# Altium PCB PCB.PcbDoc
Units mm, origin at the board's own origin, x right, y up, seen from the top; angles counter-clockwise.
Board outline 100 x 100 mm, 2 copper layers (Top Layer, Bottom Layer); 39 components, 20 nets, 100 pads, 0 vias.
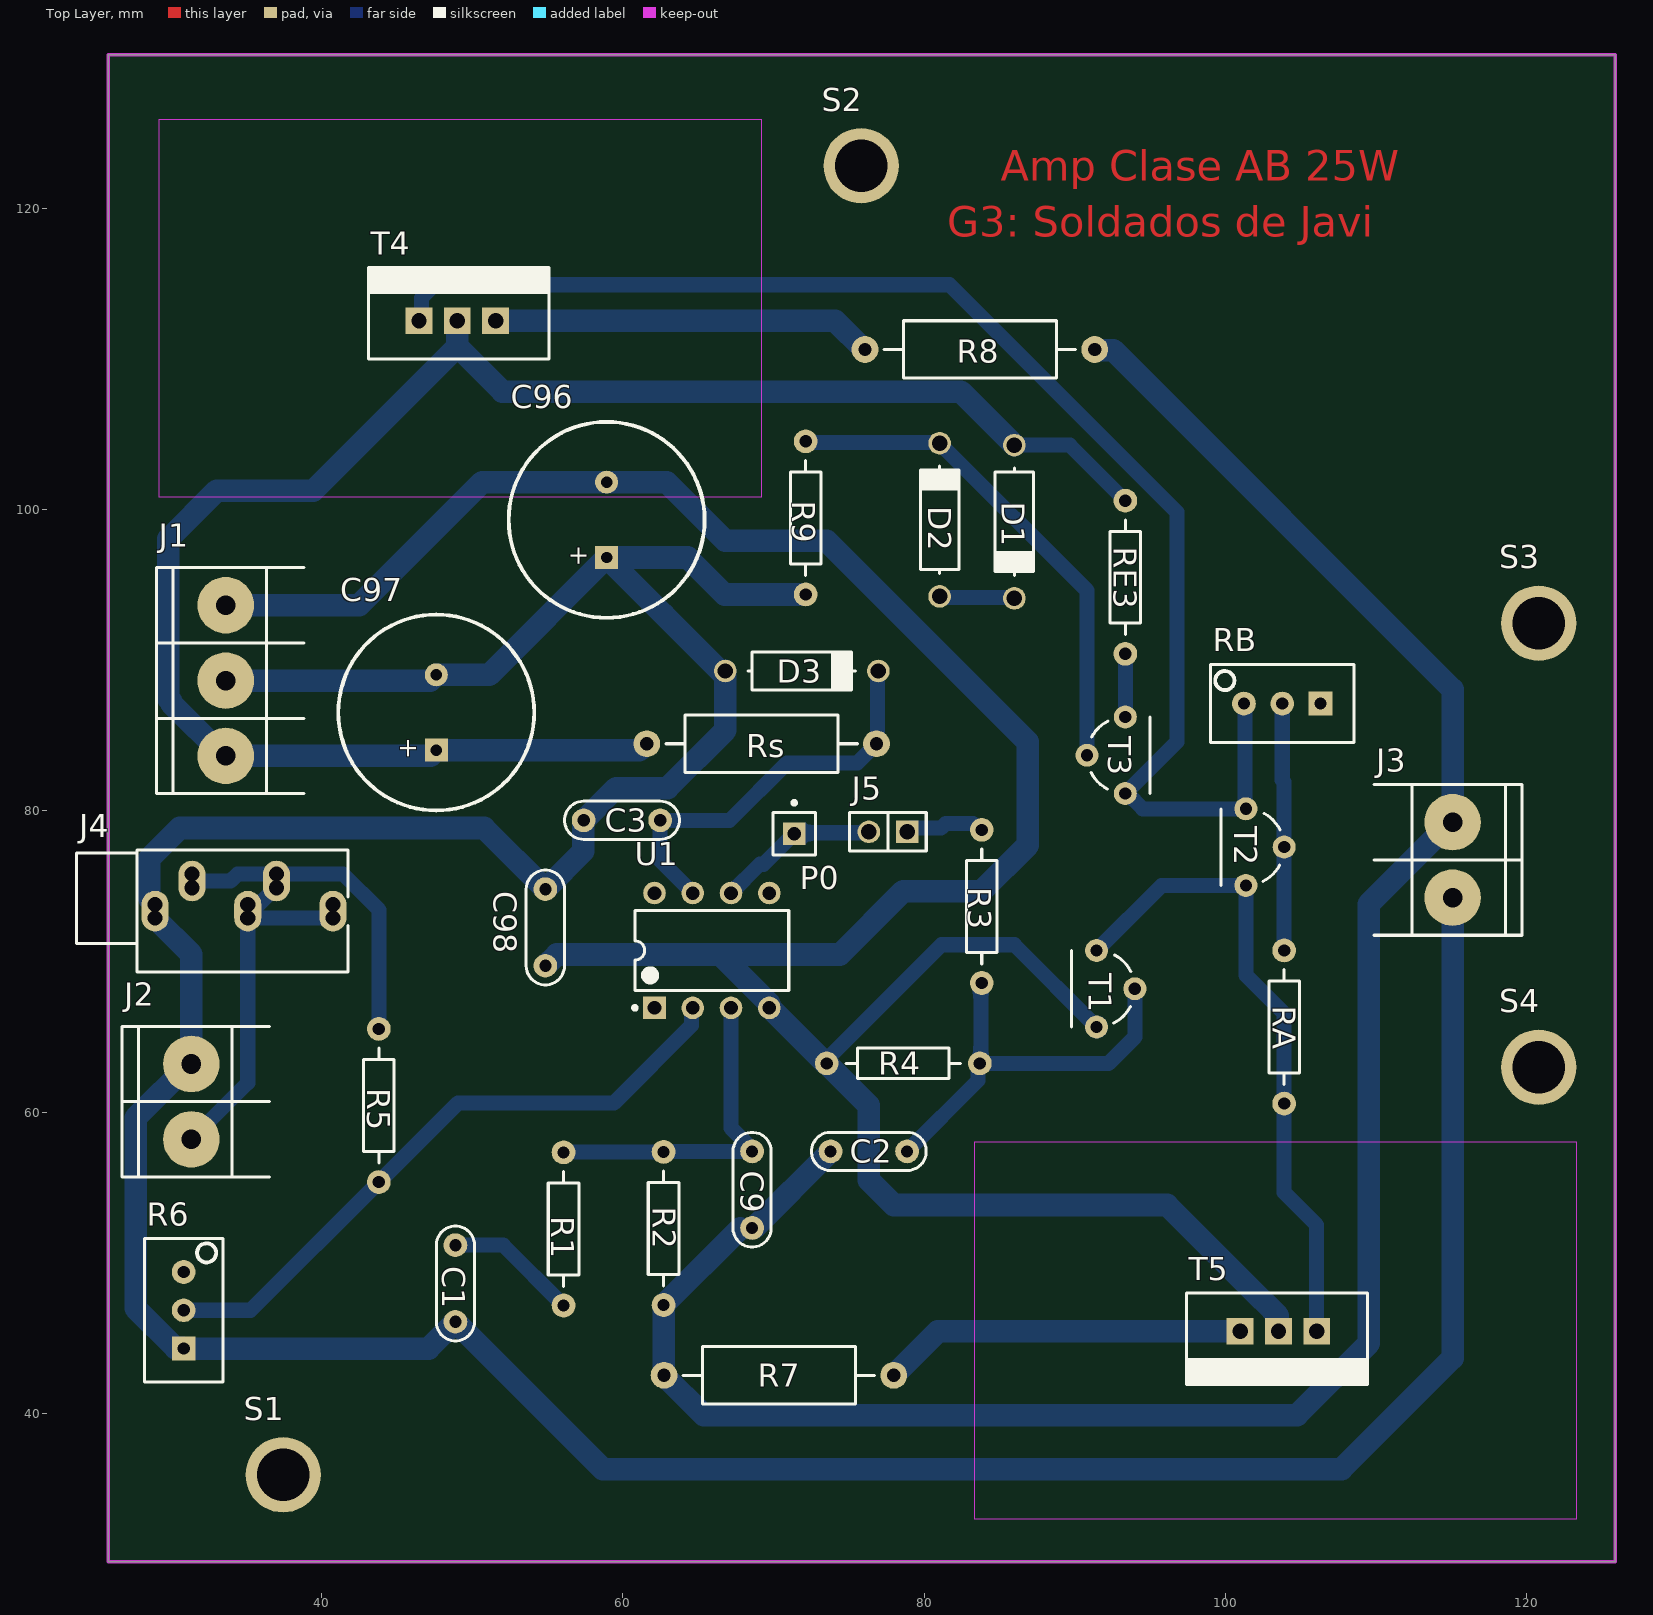
[diagram p0: Top Layer view]
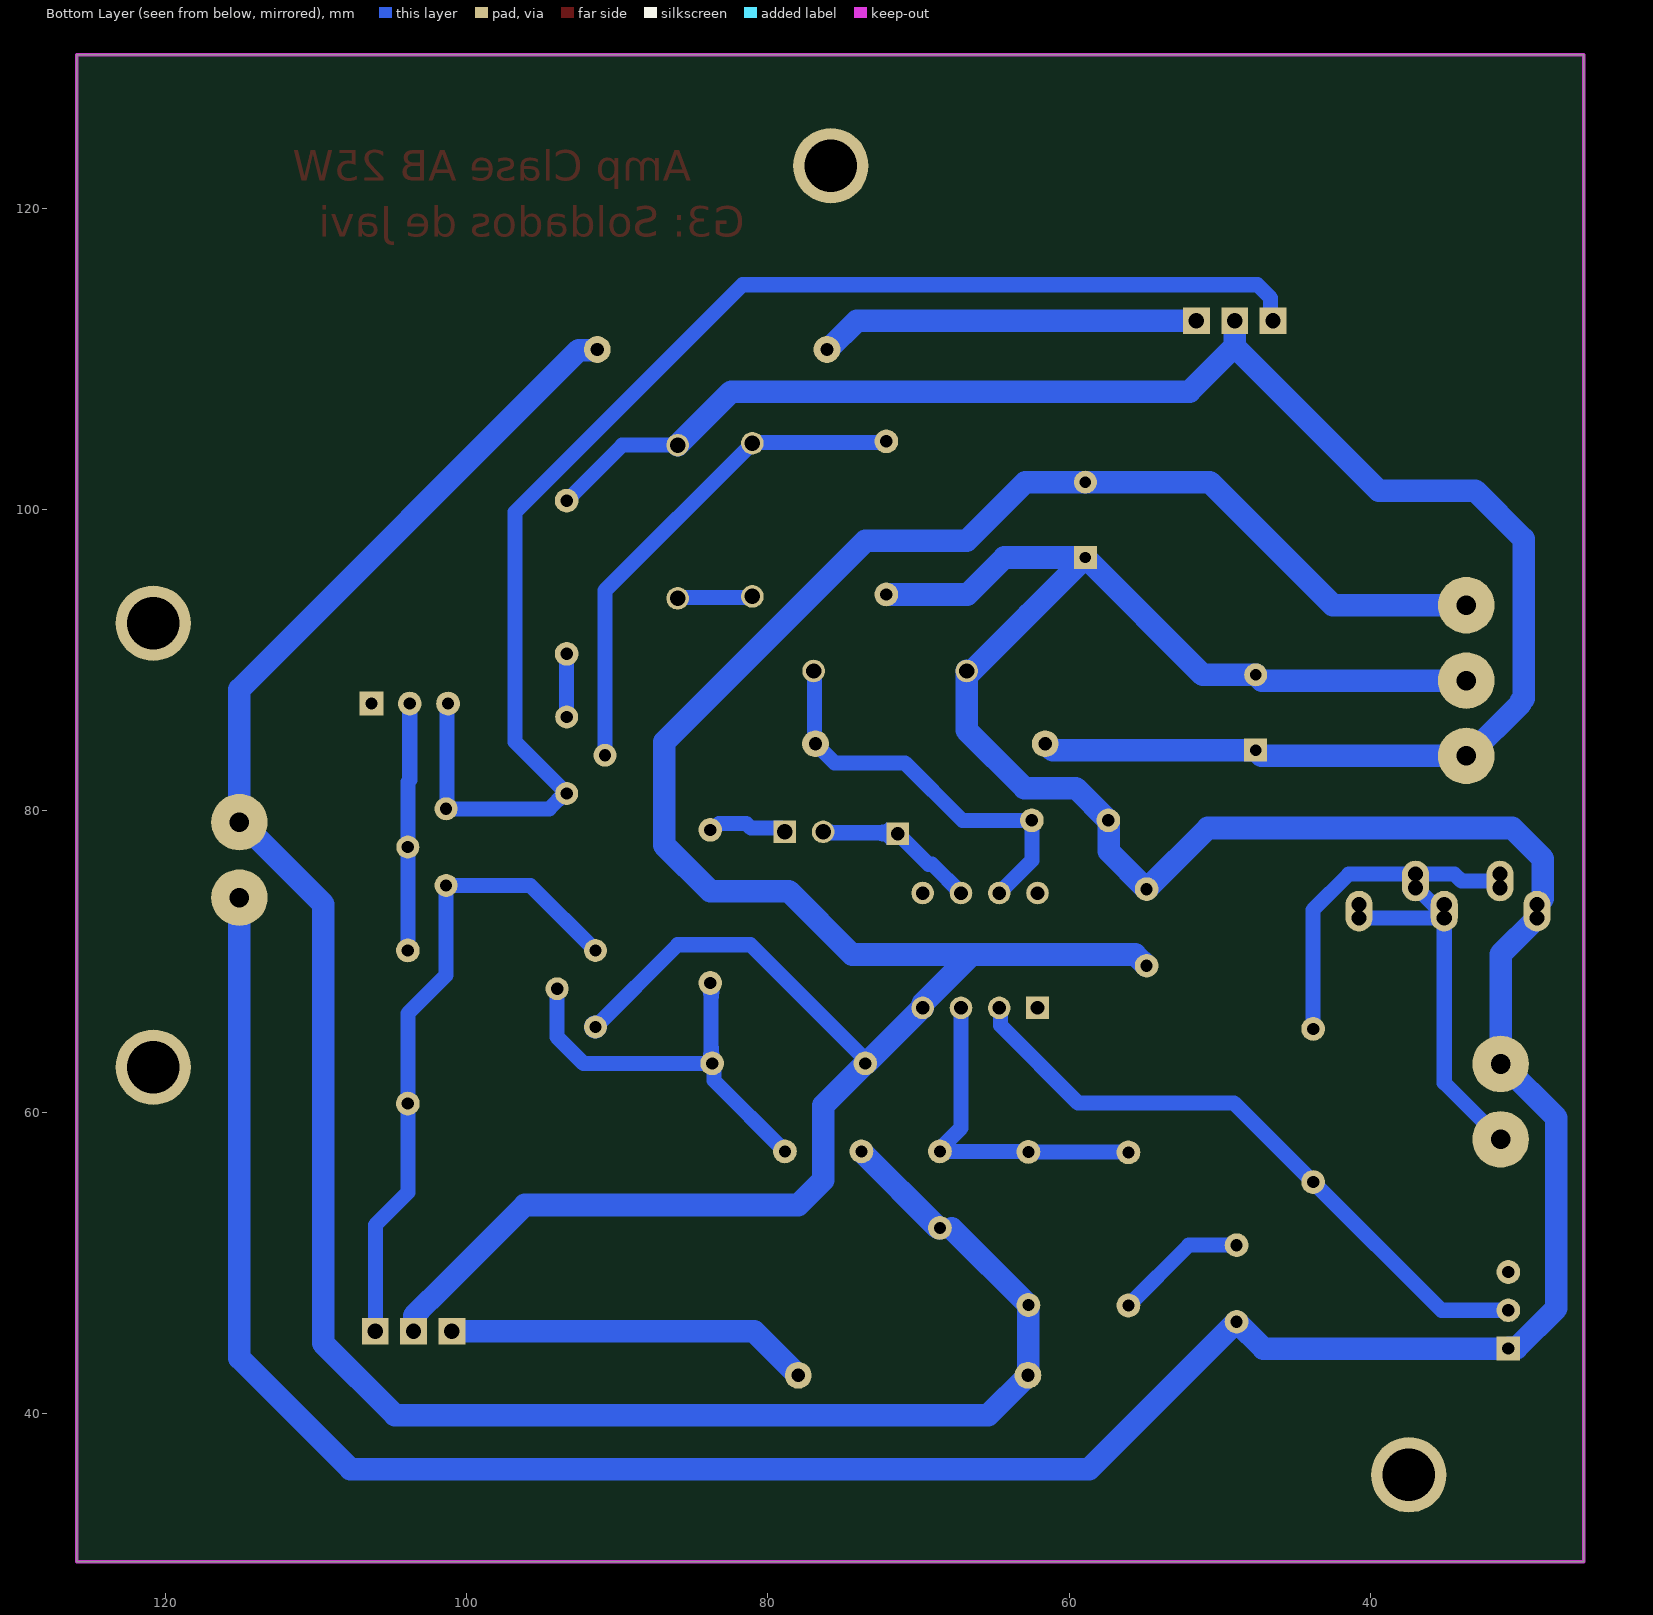
[diagram p1: Bottom Layer view, seen from below]
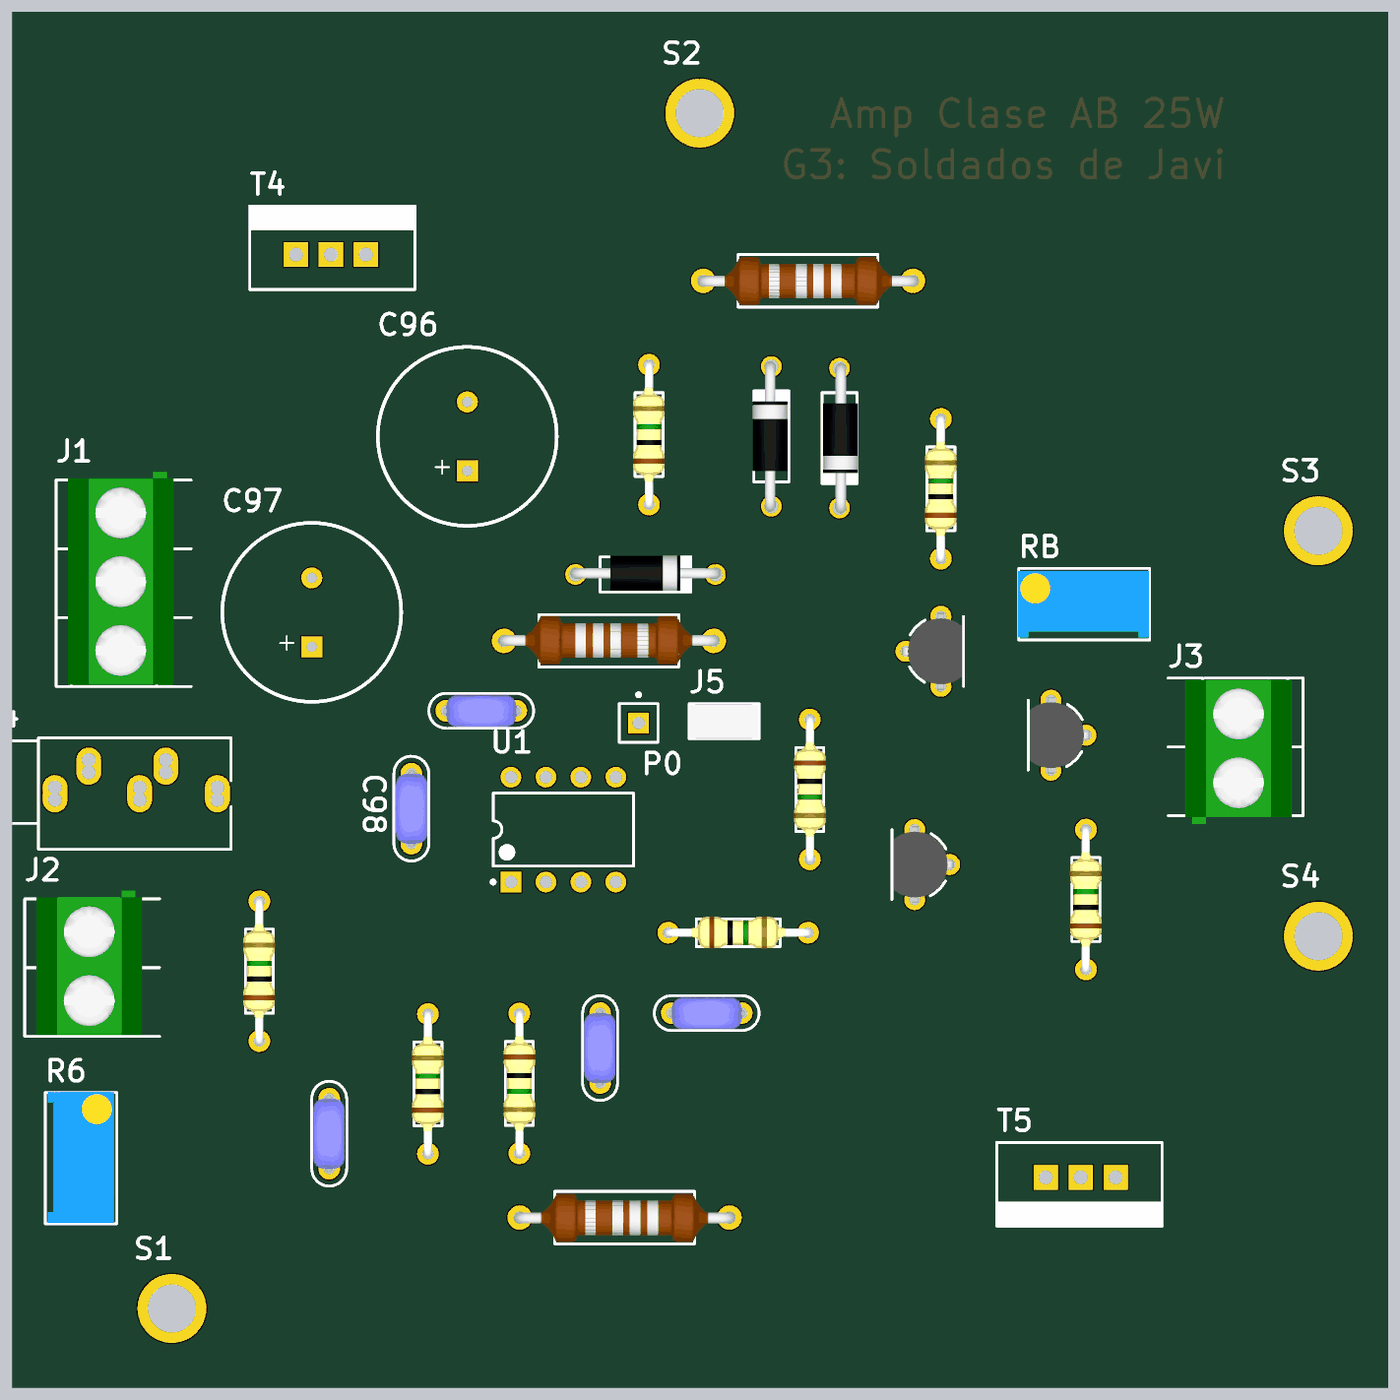
[diagram p2: 3D render of the assembled board from above, using the file's embedded part models]

## Layer stack, top to bottom
Top Solder: solder mask 0.0102, Solder Resist, Dk 3.5
Top Layer: signal copper 0.0356
Dielectric 1: dielectric 0.32, FR-4, Dk 4.8
Bottom Layer: signal copper 0.0356
Bottom Solder: solder mask 0.0102, Solder Resist, Dk 3.5

## Board outline
25.857,30.175 25.857,130.175 125.857,130.175 125.857,30.175

## Design rules (kind name [scope] priority, off if disabled: settings)
Clearance [All] p1: gap=0.5 ignorepadtopadclearanceinfootprint=FALSE
PlaneClearance [All] p1: clearance=0.75
PolygonConnect [All] p1: connectstyle=Relief reliefconductorwidth=0.5 reliefentries=4 polygonreliefangle="90 Angle" airgapwidth=0.254
RoutingVias [All] p1: holewidth=0.7 width=2 viastyle="Through Hole" minholewidth=0.7 minwidth=2 maxholewidth=0.7 maxwidth=2
SolderMaskExpansion [All] p1: expansion=0.102 istentingtop=FALSE
Width [All] p1: maxlimit=2 minlimit=1 preferedwidth=1
29 further rules are at their usual default settings.

## Components (designator, comment, footprint, x,y, rotation, side; value= is the part's Value field where it differs from the comment)
C1 "680u" CAP200 48.895,48.641 r270 top
C2 "100n" CAP200 76.327,57.404 r0 top
C3 "100n" CAP200 59.944,79.375 r0 top
C9 "220p" CAP200 68.58,54.864 r270 top
C96 "1m" CAP200RP2 58.928,99.314 r90 top
C97 "1m" CAP200RP2 47.625,86.527 r90 top
C98 "100n" CAP200 54.864,72.263 r90 top
D1 "DIODO" DO41 85.979,99.187 r270 top
D2 "DIODO" DO41 81.026,99.314 r90 top
D3 "3.3V" DO41 71.882,89.281 r0 top
J1 "BORNERA 3" BORNERA3 33.655,88.646 r0 top
J2 "BORNERA 2" BORNERA2 31.369,60.706 r0 top
J3 "BORNERA 2" BORNERA2 115.062,76.748 r180 top
J4 "Phonejack Stereo SW" ST-3150-5N 23.767,74.198 r90 top
J5 "JUMPER" JUMPER2 77.597,78.613 r180 top
P0 "Plug" PIN1 71.374,78.486 r0 top
R1 "22" RES400 56.07,47.18 r90 top
R2 "10k" RES400 62.706,57.372 r270 top
R3 "1k5" RES400 83.82,78.74 r270 top
R4 "220" RES400 73.533,63.246 r0 top
R5 "100k" RES400 43.815,55.372 r90 top
R6 "10K" "PRESET V" 30.861,46.863 r90 top
R7 "0.33" RES600 77.978,42.545 r180 top
R8 "0.33" RES600 91.313,110.617 r180 top
R9 "22k" RES400 72.136,94.361 r90 top
RA "1000" RES400 103.886,60.579 r90 top
RB "10K" "PRESET V" 103.759,87.122 r180 top
RE3 "330" RES400 93.345,90.424 r90 top
Rs "1k" RES600 61.595,84.455 r0 top
S1 "" "SUJECION (5.00MM - 3.50MM)" 37.465,35.941 r90 top
S2 "" "SUJECION (5.00MM - 3.50MM)" 75.819,122.809 r90 top
S3 "" "SUJECION (5.00MM - 3.50MM)" 120.777,92.456 r90 top
S4 "" "SUJECION (5.00MM - 3.50MM)" 120.777,62.992 r90 top
T1 "BC547" TO92 92.71,68.199 r90 top
T2 "BC547" TO92 102.616,77.597 r90 top
T3 "BC557" TO92 92.075,83.693 r270 top
T4 "TIP122" "TO-220 V" 49.022,112.522 r0 top
T5 "TIP127" "TO-220 V" 103.505,45.466 r180 top
U1 "TL081CP" P0008A 65.913,70.739 r90 top

## Footprints (in the part's own frame and the unit in brackets; to place one, negate y for a bottom-side part, rotate by r counter-clockwise, add the part's x,y. Pads: shape width x height; smd on the part's side, far side on the other; paste and mask are expansions set on the pad)
BORNERA2 [mm] "Bornera con Tornillos 5mm separación"
  round 3.75 hole 1.3: 1(0,2.5) 2(0,-2.5)
  silkscreen extent -4.6,-5 5.2,5, body extent -3.76,-4.89 3.94,5.61, height 10
BORNERA3 [mm] "Bornera con Tornillos 5mm separación"
  round 3.75 hole 1.3: 1(0,5) 2(0,0) 3(0,-5)
  silkscreen extent -4.6,-7.5 5.2,7.5, body extent -3.76,-7.39 3.94,8.11, height 10.05
CAP200 [mil]
  round 62 hole 32: 1(-100,0) 2(100,0)
  silkscreen extent -150,-50 150,50, body extent -110,-46 110,44, height 246
CAP200RP2 [mil] "Body Diameter 12.5mm"
  rect 60x60 hole 30: 1(-98.43,0)
  round 60 hole 30: 2(98.43,0)
  silkscreen extent -256,-256 256,256, body extent -246,-245 244,246, height 787
DO41 [mm]
  round 1.5 hole 1.016: 1(-5.08,0) 2(5.08,0)
  silkscreen extent -3.56,-1.27 3.56,1.27, body extent -5.46,-1.19 5.46,1.37, height 2.03
JUMPER2 [mm]
  rect 1.5x1.5 hole 1.016: 1(-1.27,0)
  round 1.5 hole 1.016: 2(1.27,0)
  silkscreen extent -2.54,-1.27 2.54,1.27, body extent -2.46,-1.27 2.54,1.27, height 9.5
P0008A [mm] "DIP, 8-Leads, Body 10.15x6.6mm, Pitch 2.54mm"
  rect 1.5x1.5 hole 0.9: 1(-3.81,3.81)
  round 1.5 hole 0.9: 2(-3.81,1.27) 3(-3.81,-1.27) 4(-3.81,-3.81) 5(3.81,-3.81) 6(3.81,-1.27) 7(3.81,1.27) 8(3.81,3.81)
  silkscreen extent -3.93,-5.1 2.65,5.23, body extent -3.95,-5.07 3.95,5.07, height 5.08
PIN1 [mm] "Connector; Plug"
  rect 1.5x1.5 hole 0.9: 1(0,0)
  silkscreen extent -1.4,-1.4 1.4,2.17
"PRESET V" [mil]
  rect 62x62 hole 32: 1(-100,0)
  round 62 hole 32: 2(0,0) 3(100,0)
  silkscreen extent -188,-102 188,102, body extent -185,-95 190,95, height 455
RES400 [mil]
  round 62 hole 32: 1(0,0) 2(400,0)
  silkscreen extent 50,-40 350,40, body extent -12,-45 412,46, height 96
RES600 [mil]
  round 70 hole 35: 1(0,0) 2(600,0)
  silkscreen extent 50,-75 550,75, body extent -16,-68 616,70, height 141
ST-3150-5N [mm] "Connector; Stereo Jack, 3.5mm, 5 Position"
  oval 2.7x1.8 all layers, no hole: 1(-0.85,-5.2) 2(1.15,-7.65) 3(-0.85,-11.35) 4(1.15,-13.25) 5(-0.85,-17)
  round 1.2 hole 1: 1A(-1.3,-5.2) 1B(-0.4,-5.2) 2A(0.7,-7.65) 2B(1.6,-7.65) 3A(-1.3,-11.35) 3B(-0.4,-11.35) 4A(0.7,-13.25) 4B(1.6,-13.25) 5A(-1.3,-17) 5B(-0.4,-17)
  silkscreen extent -4.9,-18 3.2,0
"SUJECION (5.00MM - 3.50MM)" [mm]
  round 5 hole 3.5: 1(0,0)
TO92 [mil]
  round 60 hole 32: 1(0,-50) 2(100,50) 3(-100,50)
  silkscreen extent -100,-39 100,115, body extent -110,-61 110,110, height 315
"TO-220 V" [mil]
  rect 70x70 hole 40: 1(-100,0) 2(0,0) 3(100,0)
  silkscreen extent -232,-100 240,139, body extent -197,-79 197,118, height 709

## Part data
C1 C2 C3 C9 C98: library part CAP
C96 C97: library part CAPPOL
D3: library part "DIODO ZENER"
J4: "3-Conductor Jack with 2 break contacts (normals) and 2 auxiliary make contacts", ComponentLink1Description="Manufacturer Link", ComponentLink1URL=http://domino.kycon.com/internet/Products.html, DatasheetDocument=07-Mar-2000, LatestRevisionDate=17-Dec-2003, LatestRevisionNote="PCB Footprint replaced.", Published=5-Jan-2004, Publisher="Altium Limited"
R1 R2 R3 R4 R5 R7 R8 R9 RA RE3 Rs: library part RES
R6 RB: library part PRESET
S1 S2 S3 S4: library part SUJECION
T1 T2 T4: library part "TRANSISTOR NPN"
T3 T5: library part "TRANSISTOR PNP"
U1: library part CMP-0017-00937-2, "JFET-Input Operational Amplifier, 7 to 36 V, 0 to 70 degC, 8-pin DIP (P8), Pb-Free (RoHS)", Manufacturer="Texas Instruments", Rating=Military, Total Supply Voltage(Max)(+5V is 5, +/-5V is 10)=36, Total Supply Voltage(Min)(+5V is 5, +/-5V is 10)=7, CMRR(Min)(dB)=70, Code_JEDEC=MS-001, ComponentLink1Description="Manufacturer URL", ComponentLink1URL=http://www.ti.com/, ComponentLink2Description=Datasheet, ComponentLink2URL=http://www.ti.com/lit/ds/symlink/tl081.pdf, ComponentLink3Description="Package Specification", ComponentLink3URL=http://www.ti.com/litv/pdf/mpdi001b, DatasheetVersion=SLOS081G, Eco-Plan="Pb-Free (RoHS)", GBW(Typ)(MHz)=3, IIB(Max)(pA)=400, Iq per channel(Max)(mA)=2.8, Mounting Technology="Through Hole", Number of Channels=1, Offset Drift(Typ)(uV/C)=18, PackageDescription="8-Pin Plastic In-Line, Body 9.59 x 6.35 mm, Pitch 2.54 mm", PackageReference=P0008A, PackageVersion="4040082/E, 04/2010", PartNumber=TL081CP, Slew Rate(Typ)(V/us)=13, Sub Family="General Purpose Amplifier, High Supply Voltage Amplifier (>=30V)", Vio (25C)(Max)(mV)=15, Vn at 1kHz(Typ)(nV/rtHz)=18
P0: LatestRevisionDate=17-Jul-2002, LatestRevisionNote="Re-released for DXP Platform.", Publisher="Altium Limited"

## Nets (pads, with @x,y where several pads share a name; then routed paths per layer and width w, separated by ;. In a path a pad name is that pad's centre, name@x,y a point inside that pad or via, vN(x,y) a via of type N, cw(c..) or ccw(c..) an arc to the next point about the centre after c; other vN are vias at no path point)
-VCC: C96.2 C98.1 J1.1 R4.1 T1.3 T5.2 U1.4 | length 180.8
  Bottom Layer w1: J1.1 J1.1@33.872,93.429 ; U1.4 U1.4@69.787,66.929 ; R4.1 73.533,63.402 73.82,63.689 73.82,63.787 81.15,71.117 85.982,71.117 T1.3@91.435,65.664
  Bottom Layer w1.5: J1.1 42.509,93.646 50.677,101.814 C96.2 62.908,101.814 66.805,97.917 73.533,97.917 86.868,84.582 86.868,77.724 83.82,74.676 78.613,74.676 74.406,70.469 66.471,70.469 ; C98.1 54.884,69.723 55.63,70.469 66.471,70.469 ; U1.4 69.723,67.217 66.471,70.469 ; U1.4@69.787,66.929 R4.1@73.469,63.246 ; R4.1 76.324,60.455 76.324,55.502 77.978,53.848 96.119,53.848 102.362,47.605 102.372,47.605 103.104,46.873 103.104,46.863 103.465,46.502 103.465,46.045 103.505,46.005 T5.2 ; T1.3@91.435,65.664 T1.3
GND: C1.2 C3.1 C96.1 C97.2 C98.2 D3.1 J1.2 J2.1 J3.1 J4.1 J4.1A J4.1B R6.1 R9.1 | length 263.6
  Bottom Layer w1.5: J4.1B 28.575,74.19 28.575,76.835 30.607,78.867 50.8,78.867 C98.2 57.39,77.329 57.39,79.361 C3.1 57.424,79.375 59.56,81.511 62.969,81.511 66.802,85.344 D3.1 66.461,89.281 62.701,93.042 C96.1 ; J4.1@29.024,73.798 29.024,73.405 J4.1 J4.1A 31.369,70.496 J2.1 31.242,63.206 27.686,59.65 27.686,46.99 30.316,44.36 30.824,44.36 R6.1 47.117,44.323 C1.2 58.674,36.322 107.696,36.322 115.062,43.688 J3.1 ; J1.2 47.238,88.646 47.619,89.027 C97.2 51.141,89.027 C96.1 ; R9.1 66.754,94.361 64.301,96.814 C96.1
NetC1_1: C1.1 R1.1 | length 8.9
  Bottom Layer w1: C1.1@48.927,51.213 C1.1 52.07,51.181 R1.1 R1.1@56.039,47.149
NetC2_2: C2.2 R3.2 R4.2 T1.1 | length 27.4
  Bottom Layer w1: C2.2 83.583,62.12 83.583,63.136 R4.2 ; R3.2 83.757,68.516 83.757,63.309 R4.2 ; T1.1 93.98,65 92.226,63.246 R4.2
NetC9_1: C9.1 R1.2 R2.1 U1.3 | length 22.6
  Bottom Layer w1: R1.2 56.086,57.356 62.69,57.356 R2.1 62.722,57.388 68.564,57.388 C9.1 68.58,57.56 67.183,58.957 U1.3
NetD1_2: D1.2 D2.1 | length 5.2
  Bottom Layer w1: D2.1@81.09,94.297 D2.1 81.09,94.17 85.915,94.17 D1.2 D1.2@85.915,94.043
NetD2_2: D2.2 R9.2 T3.1 | length 33.8
  Bottom Layer w1: R9.2@72.2,104.584 R9.2 72.2,104.457 80.962,104.457 D2.2 90.805,94.615 T3.1
NetJ5_1: J5.1 R3.1 | length 5.4
  Bottom Layer w1: J5.1 79.117,78.863 81.117,78.863 81.431,79.177 83.228,79.177 83.664,78.74 R3.1
NetJ5_2: J5.2 P0.1 U1.6 | length 10.8
  Bottom Layer w1: U1.6 69.092,76.458 69.346,76.458 71.438,78.549 76.263,78.549 J5.2
NetR5_1: R5.1 R6.2 U1.2 | length 42.7
  Bottom Layer w0.5: U1.2@64.643,66.908 U1.2
  Bottom Layer w1: R6.2 35.306,46.863 R5.1 49.06,60.617 59.412,60.617 64.547,65.752 64.547,66.833 U1.2
NetR7_1: R7.1 T5.3 | length 24.2
  Bottom Layer w1.5: R7.1 80.899,45.466 T5.3
NetR8_2: R8.2 T4.3 | length 25.3
  Bottom Layer w1.5: T4.3 74.093,112.522 75.998,110.617 R8.2
NetRA_1: RA.1 T1.2 T2.3 T5.1 | length 43.2
  Bottom Layer w1: T1.2 95.758,75.057 T2.3 101.346,69.095 103.886,66.555 RA.1 103.886,54.677 106.045,52.518 T5.1
NetRA_2: RA.2 RB.2 T2.1 | length 16.4
  Bottom Layer w1: RB.2 103.759,82.042 103.886,81.915 RA.2
NetRB_3: RB.3 T2.2 T3.2 T4.1 | length 93.9
  Bottom Layer w1: T4.1 46.633,112.673 46.633,114.032 47.512,114.911 81.685,114.911 96.774,99.822 96.774,84.582 T3.2 93.487,81.153 94.503,80.137 T2.2 101.282,80.2 101.282,87.058 RB.3
NetRE3_1: RE3.1 T3.3 | length 4.2
  Bottom Layer w1: T3.3 RE3.1
Out: C2.1 C9.2 J3.2 R2.2 R7.2 R8.1 | length 147.9
  Bottom Layer w1.5: C9.2@67.804,52.31 R2.2 62.721,47.198 62.721,42.562 R7.2 65.377,39.906 104.738,39.906 109.501,44.669 109.501,73.813 114.935,79.248 J3.2 115.062,88.058 92.556,110.564 91.366,110.564 R8.1 ; C9.2 68.594,52.338 68.721,52.338 C2.1
Signal: J2.2 J4.2 J4.2A J4.2B J4.3 J4.3A J4.3B J4.4 J4.4A J4.4B J4.5 J4.5A J4.5B R5.2 | length 47.2
  Bottom Layer w1: J2.2 35.117,61.954 J4.3A J4.5A ; J4.2@31.787,74.745 31.417,75.114 J4.2 33.98,75.348 34.43,75.798 J4.4B 41.454,75.798 43.815,73.437 R5.2 ; J4.3B 35.155,73.836 35.901,73.836 36.963,74.898 J4.4A ; J4.4 37.017,75.114 J4.4@37.387,74.745
VCC: C97.1 D1.1 J1.3 RE3.2 Rs.1 T4.2 | length 119.2
  Bottom Layer w1: Rs.1@61.531,84.391 Rs.1 ; D1.1 89.662,104.267 RE3.2
  Bottom Layer w1.5: T4.2 49.022,110.809 ; Rs.1 61.52,84.455 61.092,84.027 C97.1 47.244,83.646 J1.3 33.528,83.646 30.03,87.144 30.03,87.271 29.845,87.456 29.845,98.044 33.056,101.255 39.468,101.255 49.022,110.809 ; D1.1 82.424,107.822 52.009,107.822 49.022,110.809
Vopam: C3.2 D3.2 Rs.2 U1.7 | length 27.1
  Bottom Layer w1: U1.7 62.484,76.708 C3.2 67.092,79.375 70.902,83.185 75.565,83.185 76.898,84.519 76.898,89.218 D3.2
pads on no net: R6.3 RB.1 S1.1 S2.1 S3.1 S4.1 U1.1 U1.5 U1.8

## Keep-outs
Top Layer:
  rectangle: 83.312,33.02 123.312,58.02
  rectangle: 29.21,100.857 69.21,125.857
Keep-Out Layer:
  the board outline again, w0.254

## Other copper
Top Layer:
  text "Amp Clase AB 25W" at 85.09,121.824 h2
  text "G3: Soldados de Javi" at 81.534,118.11 h2

## Text inside footprints (layer, text, board x,y; h text height)
C96: Top Overlay "+" at 57.607,96.215 h1.27 r90
C97: Top Overlay "+" at 46.304,83.428 h1.27 r90